# Altium PCB 5111HB015.pcbdoc
Units mm, origin at the board's own origin, x right, y up, seen from the top; angles counter-clockwise.
Board outline 132.28 x 111.66 mm, 2 copper layers (Top Layer, Top, Bottom Layer, Bottom); 10 components, 28 nets, 376 pads, 5 vias.
Unrouted connection lines stored in the file: 10.
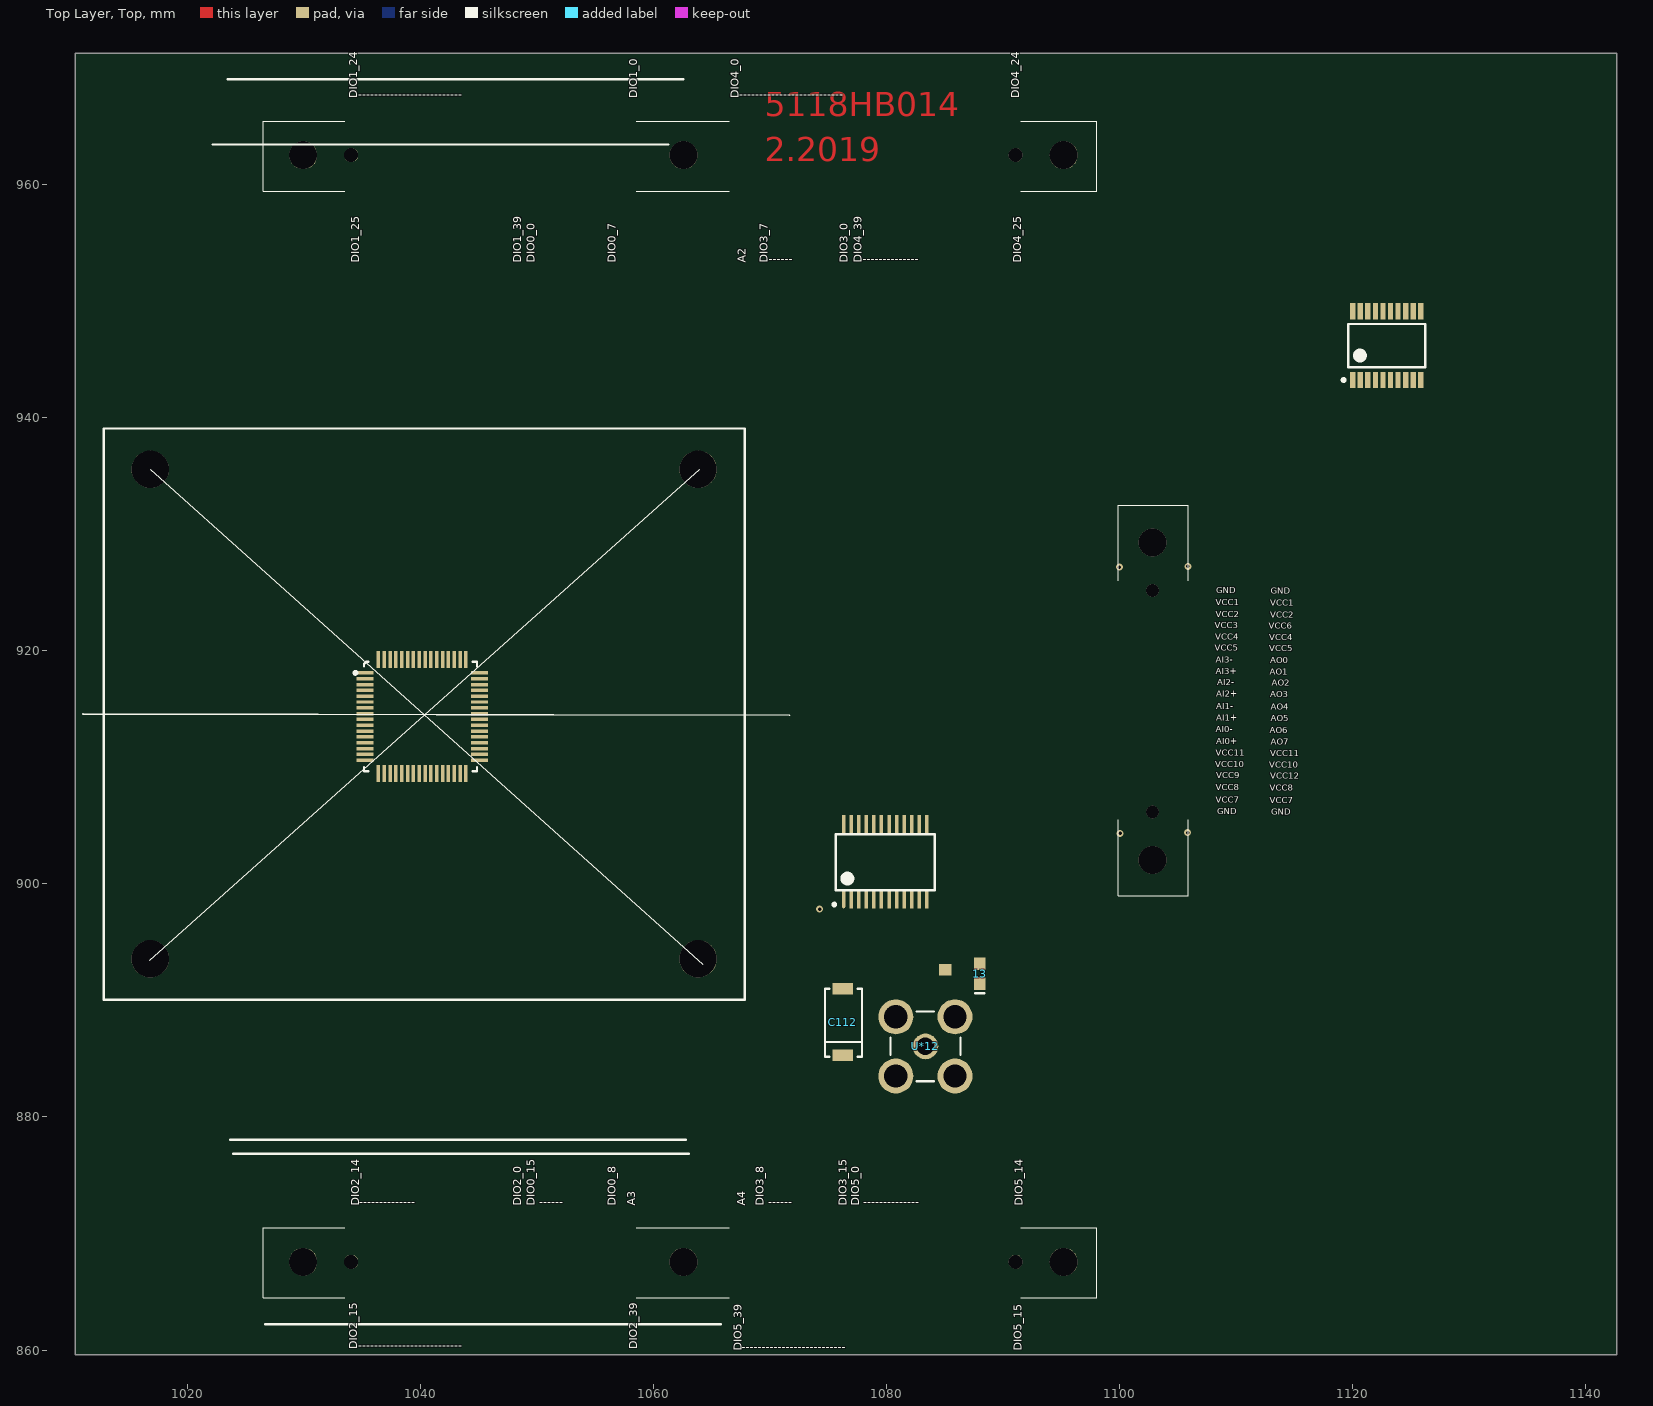
[diagram p0: Top Layer, Top view]
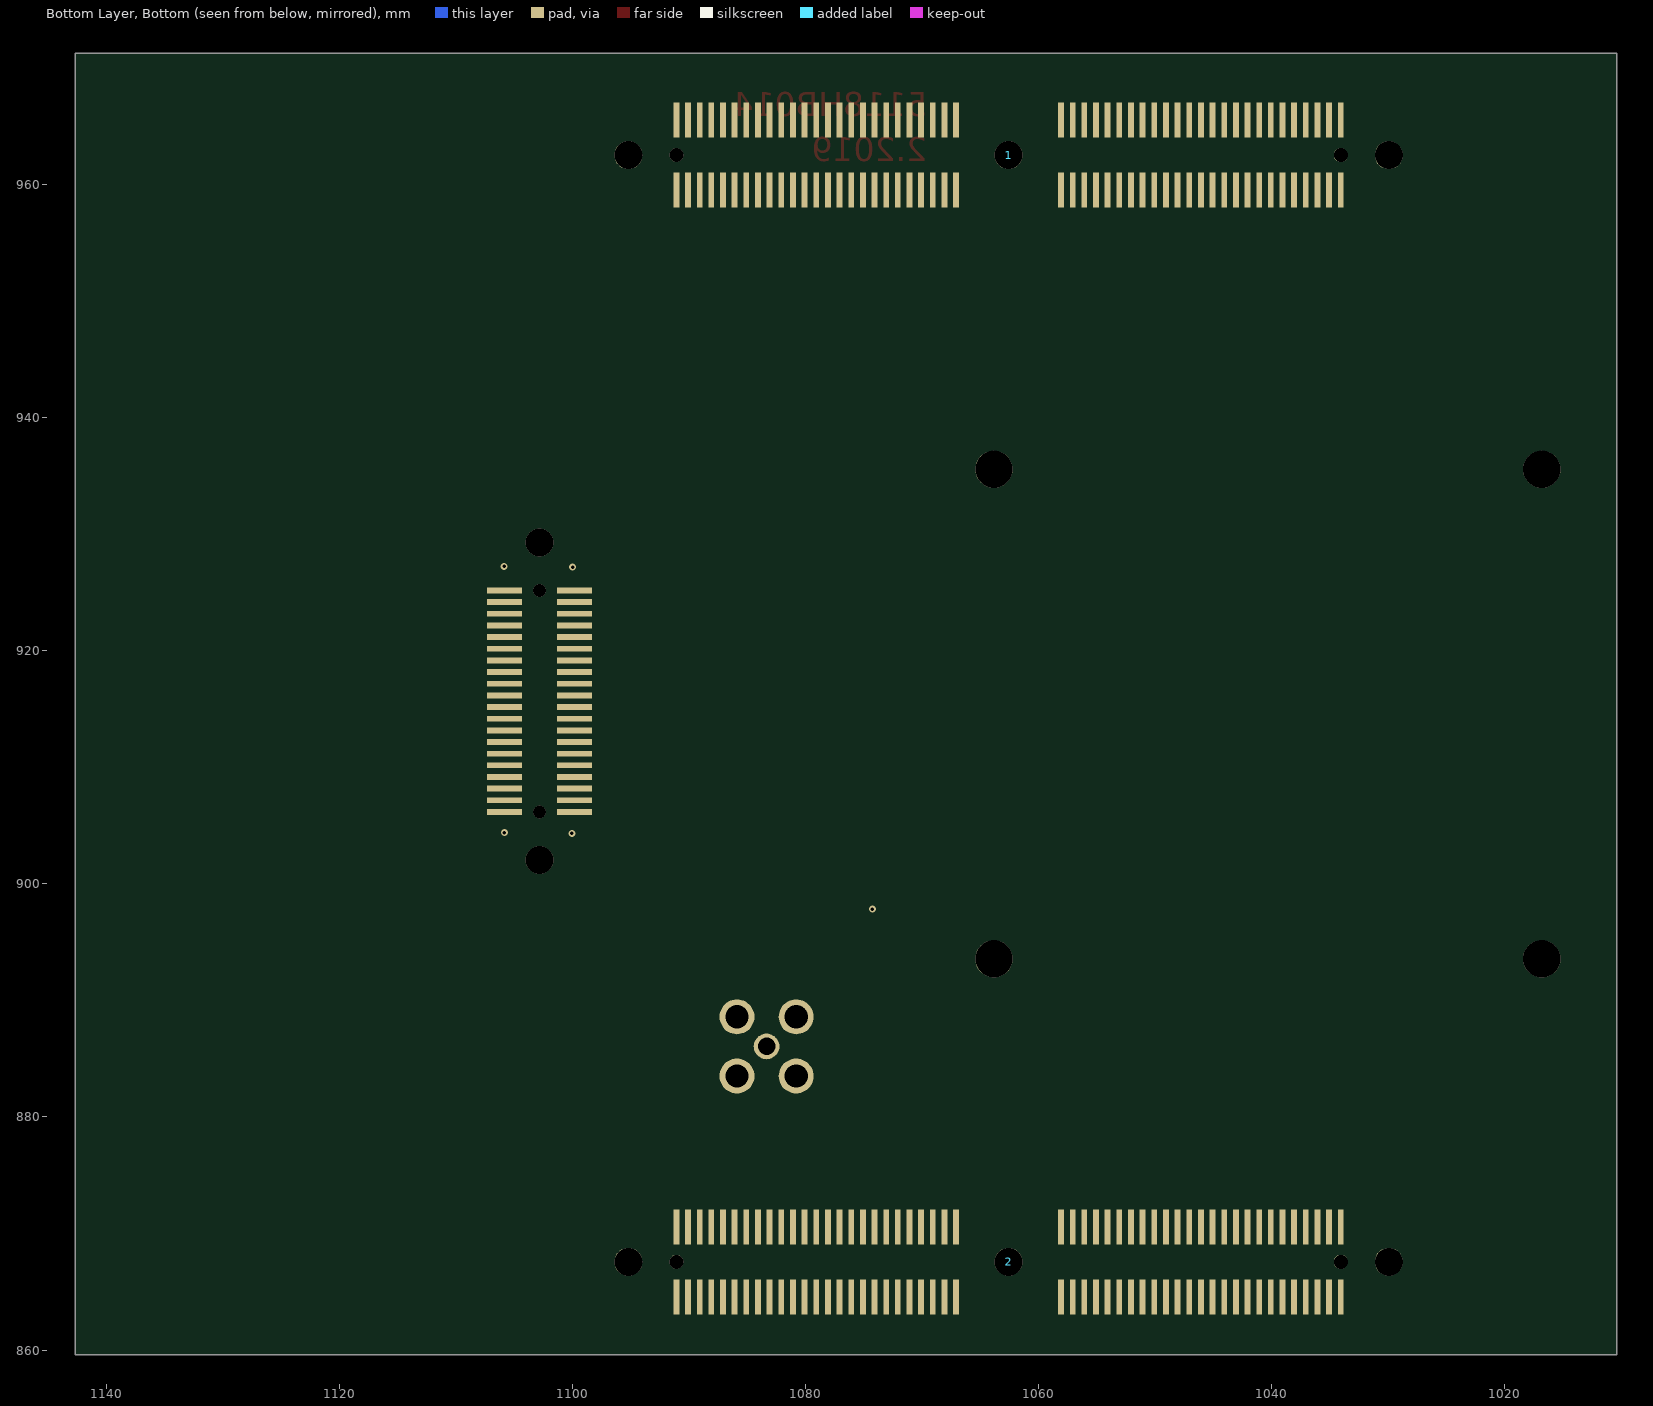
[diagram p1: Bottom Layer, Bottom view, seen from below]

## Layer stack, top to bottom
Top Solder, Top Mask: solder mask 0.0102, Solder Resist, Dk 3.5
Top Layer, Top: signal copper 0.0356
Dielectric 1: dielectric 0.32, FR-4, Dk 4.8
Bottom Layer, Bottom: signal copper 0.0356
Bottom Solder, Bot Mask: solder mask 0.0102, Solder Resist, Dk 3.5

## Board outline
1010.392,859.619 1142.675,859.619 1142.675,971.275 1010.392,971.275

## Design rules (kind name [scope] priority, off if disabled: settings)
Clearance [All] p1: gap=0.254 except(0.13: Arc-Arc Arc-Track Track-Track; 0.15: Arc-SMDPad Arc-THPad Arc-Via Arc-Fill Arc-Poly Arc-Region Track-SMDPad Track-THPad Track-Via Track-Fill Track-Poly Track-Region SMDPad-SMDPad THPad-THPad THPad-Via; 0.2: SMDPad-Fill SMDPad-Poly SMDPad-Region Via-Via)
PlaneClearance [All] p1: clearance=0.254
PolygonConnect PolygonConnect_4 [IsPolygon And InNet('GND') And OnLayer('Bottom Layer, Bottom') vs IsVia] p1: connectstyle=Relief reliefconductorwidth=0.381 reliefentries=4 polygonreliefangle="90 Angle" airgapwidth=0.254
PolygonConnect PolygonConnect_3 [IsPolygon And InNet('GND') And OnLayer('Bottom Layer, Bottom') vs IsPad] p2: connectstyle=Relief reliefconductorwidth=0.3 reliefentries=4 polygonreliefangle="90 Angle" airgapwidth=0.254
PolygonConnect PolygonConnect_2 [IsPolygon And InNet('GND') And OnLayer('Top Layer, Top') vs IsVia] p3: connectstyle=Relief reliefconductorwidth=0.381 reliefentries=4 polygonreliefangle="90 Angle" airgapwidth=0.254
PolygonConnect PolygonConnect_1 [IsPolygon And InNet('GND') And OnLayer('Top Layer, Top') vs IsPad] p4: connectstyle=Relief reliefconductorwidth=0.3 reliefentries=4 polygonreliefangle="90 Angle" airgapwidth=0.254
PolygonConnect [All] p5: connectstyle=Relief reliefconductorwidth=0.254 reliefentries=4 polygonreliefangle="90 Angle" airgapwidth=0.254
RoutingVias [All] p1: holewidth=0.3 width=0.6 viastyle="Through Hole" minholewidth=0.3 minwidth=0.6 maxholewidth=0.3 maxwidth=0.6
SolderMaskExpansion [All] p1: expansion=0.102
Width [All] p1: maxlimit=0.6 minlimit=0.3 preferedwidth=0.4
29 further rules are at their usual default settings.

## Components (designator, comment, footprint, x,y, rotation, side; value= is the part's Value field where it differs from the comment)
1 "" FSI-150-AD-V1_OTV 1034.027,965.435 r0 top
2 "" FSI-150-AD-V1_OTV 1034.027,870.493 r0 top
13 "" CC1608-0603 1088,892.3 r90 top
C112 "" К53-37-C_К53-37_C(Primary) 1076.25,885.285 r90 top
U*12 "" 919-109J 1083.35,886.05 r0 top
? "Comment" 5118HB014 1040.175,914.35 r0 top
? "Comment" AD5781 1122.925,946.175 r90 top
? "" FSI-120-AD-V2_OTV 1100.371,906.327 r90 top
? "Comment" SN74LVC4245A_SSOP_24 1079.9,901.85 r90 top
? "Comment" pad 1085.65,892.025 r90 top

## Footprints (in the part's own frame and the unit in brackets; to place one, negate y for a bottom-side part, rotate by r counter-clockwise, add the part's x,y. Pads: shape width x height; smd on the part's side, far side on the other; paste and mask are expansions set on the pad)
919-109J [mm]
  round 2.2 hole 1.5: 1(0,0)
  round 3 hole 2: 2(-2.54,-2.54) 3(2.54,-2.54) 4(2.54,2.54) 5(-2.54,2.54)
  silkscreen extent -3,-3 3,3
5118HB014 [mm] "МК5157.64-1"
  rect 1.45x0.3 smd: 1(-4.9,3.75) 2(-4.9,3.25) 3(-4.9,2.75) 4(-4.9,2.25) 5(-4.9,1.75) 6(-4.9,1.25) 7(-4.9,0.75) 8(-4.9,0.25) 9(-4.9,-0.25) 10(-4.9,-0.75) 11(-4.9,-1.25) 12(-4.9,-1.75) 13(-4.9,-2.25) 14(-4.9,-2.75) 15(-4.9,-3.25) 16(-4.9,-3.75) 33(4.9,-3.75) 34(4.9,-3.25) 35(4.9,-2.75) 36(4.9,-2.25) 37(4.9,-1.75) 38(4.9,-1.25) 39(4.9,-0.75) 40(4.9,-0.25) 41(4.9,0.25) 42(4.9,0.75) 43(4.9,1.25) 44(4.9,1.75) 45(4.9,2.25) 46(4.9,2.75) 47(4.9,3.25) 48(4.9,3.75)
  rect 0.3x1.45 smd: 17(-3.75,-4.9) 18(-3.25,-4.9) 19(-2.75,-4.9) 20(-2.25,-4.9) 21(-1.75,-4.9) 22(-1.25,-4.9) 23(-0.75,-4.9) 24(-0.25,-4.9) 25(0.25,-4.9) 26(0.75,-4.9) 27(1.25,-4.9) 28(1.75,-4.9) 29(2.25,-4.9) 30(2.75,-4.9) 31(3.25,-4.9) 32(3.75,-4.9) 49(3.75,4.9) 50(3.25,4.9) 51(2.75,4.9) 52(2.25,4.9) 53(1.75,4.9) 54(1.25,4.9) 55(0.75,4.9) 56(0.25,4.9) 57(-0.25,4.9) 58(-0.75,4.9) 59(-1.25,4.9) 60(-1.75,4.9) 61(-2.25,4.9) 62(-2.75,4.9) 63(-3.25,4.9) 64(-3.75,4.9)
  silkscreen extent -5.85,-4.7 4.7,4.7, body extent -4.5,-4.5 4.5,4.5, height 1.94
AD5781 [mm] "tssop,20"
  rect 1.4x0.45 smd: 1(-2.95,2.925) 2(-2.95,2.275) 3(-2.95,1.625) 4(-2.95,0.975) 5(-2.95,0.325) 6(-2.95,-0.325) 7(-2.95,-0.975) 8(-2.95,-1.625) 9(-2.95,-2.275) 10(-2.95,-2.925) 11(2.95,-2.925) 12(2.95,-2.275) 13(2.95,-1.625) 14(2.95,-0.975) 15(2.95,-0.325) 16(2.95,0.325) 17(2.95,0.975) 18(2.95,1.625) 19(2.95,2.275) 20(2.95,2.925)
  silkscreen extent -3.07,-3.3 1.85,3.82, body extent -2.25,-3.3 2.25,3.3, height 1.2
CC1608-0603 [mm]
  rect 1.1x1 smd: 1(-0.85,0) 2(0.85,0)
  silkscreen extent -1.7,-0.4 -1.7,0.4
FSI-120-AD-V2_OTV [mm]
  rect 0.5x3 smd far side: 1(-0.16,0.54) 2(0.84,0.54) 3(1.84,0.54) 4(2.84,0.54) 5(3.84,0.54) 6(4.84,0.54) 7(5.84,0.54) 8(6.84,0.54) 9(7.84,0.54) 10(8.84,0.54) 11(9.84,0.54) 12(10.84,0.54) 13(11.84,0.54) 14(12.84,0.54) 15(13.84,0.54) 16(14.84,0.54) 17(15.84,0.54) 18(16.84,0.54) 19(17.84,0.54) 20(18.84,0.54) 21(18.84,-5.46) 22(17.84,-5.46) 23(16.84,-5.46) 24(15.84,-5.46) 25(14.84,-5.46) 26(13.84,-5.46) 27(12.84,-5.46) 28(11.84,-5.46) 29(10.84,-5.46) 30(9.84,-5.46) 31(8.84,-5.46) 32(7.84,-5.46) 33(6.84,-5.46) 34(5.84,-5.46) 35(4.84,-5.46) 36(3.84,-5.46) 37(2.84,-5.46) 38(1.84,-5.46) 39(0.84,-5.46) 40(-0.16,-5.46)
  round 1.1 hole 1.1 unplated: 41(-0.16,-2.46) 42(18.84,-2.46)
  round 2.4 hole 2.4 unplated: 43(-4.28,-2.46) 44(22.96,-2.46)
  silkscreen extent -7.34,-5.54 26.16,0.46
FSI-150-AD-V1_OTV [mm]
  rect 0.5x3 smd far side: 1(0.06,0.08) 2(1.06,0.08) 3(2.06,0.08) 4(3.06,0.08) 5(4.06,0.08) 6(5.06,0.08) 7(6.06,0.08) 8(7.06,0.08) 9(8.06,0.08) 10(9.06,0.08) 11(10.06,0.08) 12(11.06,0.08) 13(12.06,0.08) 14(13.06,0.08) 15(14.06,0.08) 16(15.06,0.08) 17(16.06,0.08) 18(17.06,0.08) 19(18.06,0.08) 20(19.06,0.08) 21(20.06,0.08) 22(21.06,0.08) 23(22.06,0.08) 24(23.06,0.08) 25(24.06,0.08) 26(33.06,0.08) 27(34.06,0.08) 28(35.06,0.08) 29(36.06,0.08) 30(37.06,0.08) 31(38.06,0.08) 32(39.06,0.08) 33(40.06,0.08) 34(41.06,0.08) 35(42.06,0.08) 36(43.06,0.08) 37(44.06,0.08) 38(45.06,0.08) 39(46.06,0.08) 40(47.06,0.08) 41(48.06,0.08) 42(49.06,0.08) 43(50.06,0.08) 44(51.06,0.08) 45(52.06,0.08) 46(53.06,0.08) 47(54.06,0.08) 48(55.06,0.08) 49(56.06,0.08) 50(57.06,0.08) 51(57.06,-5.92) 52(56.06,-5.92) 53(55.06,-5.92) 54(54.06,-5.92) 55(53.06,-5.92) 56(52.06,-5.92) 57(51.06,-5.92) 58(50.06,-5.92) 59(49.06,-5.92) 60(48.06,-5.92) 61(47.06,-5.92) 62(46.06,-5.92) 63(45.06,-5.92) 64(44.06,-5.92) 65(43.06,-5.92) 66(42.06,-5.92) 67(41.06,-5.92) 68(40.06,-5.92) 69(39.06,-5.92) 70(38.06,-5.92) 71(37.06,-5.92) 72(36.06,-5.92) 73(35.06,-5.92) 74(34.06,-5.92) 75(33.06,-5.92) 76(24.06,-5.92) 77(23.06,-5.92) 78(22.06,-5.92) 79(21.06,-5.92) 80(20.06,-5.92) 81(19.06,-5.92) 82(18.06,-5.92) 83(17.06,-5.92) 84(16.06,-5.92) 85(15.06,-5.92) 86(14.06,-5.92) 87(13.06,-5.92) 88(12.06,-5.92) 89(11.06,-5.92) 90(10.06,-5.92) 91(9.06,-5.92) 92(8.06,-5.92) 93(7.06,-5.92) 94(6.06,-5.92) 95(5.06,-5.92) 96(4.06,-5.92) 97(3.06,-5.92) 98(2.06,-5.92) 99(1.06,-5.92) 100(0.06,-5.92)
  round 2.4 hole 2.4 unplated: 101(-4.06,-2.92) 102(28.56,-2.92) 103(61.18,-2.92)
  round 1.2 hole 1.2 unplated: 104(0.06,-2.92) 105(57.06,-2.92)
  silkscreen extent -7.5,-6 64,0
pad [mm]
  rect 1x1.1 smd: 1(0.6,0.6)
SN74LVC4245A_SSOP_24 [mm]
  oval 1.65x0.3 smd: 1(-3.125,3.575)
  rect 1.65x0.3 smd: 2(-3.125,2.925) 3(-3.125,2.275) 4(-3.125,1.625) 5(-3.125,0.975) 6(-3.125,0.325) 7(-3.125,-0.325) 8(-3.125,-0.975) 9(-3.125,-1.625) 10(-3.125,-2.275) 11(-3.125,-2.925) 12(-3.125,-3.575) 13(3.225,-3.575) 14(3.225,-2.925) 15(3.225,-2.275) 16(3.225,-1.625) 17(3.225,-0.975) 18(3.225,-0.325) 19(3.225,0.325) 20(3.225,0.975) 21(3.225,1.625) 22(3.225,2.275) 23(3.225,2.925) 24(3.225,3.575)
  silkscreen extent -3.75,-4.25 2.4,4.5, body extent -3.28,-3.95 3.28,3.95, height 1.2
К53-37-C_К53-37_C(Primary) [mm]
  rect 1x1.75 smd: A(5.715,0) B(0,0)
  silkscreen extent -0.13,-1.65 5.71,1.52

## Part data
C112: "Capacitor"

## Free pads (board coordinates)
  round 3.2 hole 3.2 unplated: 0(1016.842,893.566) 0(1016.842,935.566) 0(1063.842,893.566) 0(1063.842,935.566)

## Via types
v1: diameter 0.6, hole 0.3, Top Layer, Top to Bottom Layer, Bottom, tented both sides, 4 vias
v2: diameter 0.6, hole 0.3, Top Layer, Top to Bottom Layer, Bottom, 1 vias

## Nets (pads, with @x,y where several pads share a name; then routed paths per layer and width w, separated by ;. In a path a pad name is that pad's centre, name@x,y a point inside that pad or via, vN(x,y) a via of type N, cw(c..) or ccw(c..) an arc to the next point about the centre after c; other vN are vias at no path point)
CLK: ?.5@1035.275,916.1
CLK_SH: ?.6@1035.275,915.6
D01: ?.50
D02: ?.49
D03: ?.48
D04: ?.47
D05: ?.46
D06: ?.45
D07: ?.44@1045.075,916.1
D08: ?.43@1045.075,915.6
D09: ?.42@1045.075,915.1
D10: ?.41@1045.075,914.6
D11: ?.40@1045.075,914.1
D12: ?.39@1045.075,913.6
D13: ?.38@1045.075,913.1
D14: ?.37@1045.075,912.6
D15: 
GND_0: ?.28@1041.925,909.45
GND_A: ?.1@1035.275,918.1 ?.55 ?.56 ?.57 ?.58 ?.63
GND_D: ?.35@1045.075,911.6
INADC: ?.62
READY: ?.36@1045.075,912.1
RESET: ?.32@1043.925,909.45
RESETSAR: ?.33@1045.075,910.6
STROB: 
Vbias: ?.61
Vcc: ?.2@1035.275,917.6 ?.53 ?.54 ?.59 ?.60 ?.64
Vccd: ?.34@1045.075,911.1
pads on no net: 1.1 1.2 1.3 1.4 1.5 1.6 1.7 1.8 1.9 1.10 1.11 1.12 1.13 1.14 1.15 1.16 1.17 1.18 1.19 1.20 1.21 1.22 1.23 1.24 1.25 1.26 1.27 1.28 1.29 1.30 1.31 1.32 1.33 1.34 1.35 1.36 1.37 1.38 1.39 1.40 1.41 1.42 1.43 1.44 1.45 1.46 1.47 1.48 1.49 1.50 1.51 1.52 1.53 1.54 1.55 1.56 1.57 1.58 1.59 1.60 1.61 1.62 1.63 1.64 1.65 1.66 1.67 1.68 1.69 1.70 1.71 1.72 1.73 1.74 1.75 1.76 1.77 1.78 1.79 1.80 1.81 1.82 1.83 1.84 1.85 1.86 1.87 1.88 1.89 1.90 1.91 1.92 1.93 1.94 1.95 1.96 1.97 1.98 1.99 1.100 1.101 1.102 1.103 1.104 1.105 2.1 2.2 2.3 2.4 2.5 2.6 2.7 2.8 2.9 2.10 2.11 2.12 2.13 2.14 2.15 2.16 2.17 2.18 2.19 2.20 2.21 2.22 2.23 2.24 2.25 2.26 2.27 2.28 2.29 2.30 2.31 2.32 2.33 2.34 2.35 2.36 2.37 2.38 2.39 2.40 2.41 2.42 2.43 2.44 2.45 2.46 2.47 2.48 2.49 2.50 2.51 2.52 2.53 2.54 2.55 2.56 2.57 2.58 2.59 2.60 2.61 2.62 2.63 2.64 2.65 2.66 2.67 2.68 2.69 2.70 2.71 2.72 2.73 2.74 2.75 2.76 2.77 2.78 2.79 2.80 2.81 2.82 2.83 2.84 2.85 2.86 2.87 2.88 2.89 2.90 2.91 2.92 2.93 2.94 2.95 2.96 2.97 2.98 2.99 2.100 2.101 2.102 2.103 2.104 2.105 13.1 13.2 ?.1@1076.325,898.725 ?.1@1085.05,892.625 ?.1@1099.831,906.167 ?.1@1120,943.225 ?.2@1076.975,898.725 ?.2@1099.831,907.167 ?.2@1120.65,943.225 ?.3 ?.4 ?.5@1078.925,898.725 ?.5@1099.831,910.167 ?.5@1122.6,943.225 ?.6@1079.575,898.725 ?.6@1099.831,911.167 ?.6@1123.25,943.225 ?.7 ?.8 ?.9 ?.10 ?.11 ?.12 ?.13 ?.14 ?.15 ?.16 ?.17 ?.18 ?.19 ?.20 ?.21 ?.22 ?.23 ?.24 ?.25 ?.26 ?.27 ?.28@1105.831,918.167 ?.29 ?.30 ?.31 ?.32@1105.831,914.167 ?.33@1105.831,913.167 ?.34@1105.831,912.167 ?.35@1105.831,911.167 ?.36@1105.831,910.167 ?.37@1105.831,909.167 ?.38@1105.831,908.167 ?.39@1105.831,907.167 ?.40@1105.831,906.167 ?.41@1102.831,906.167 ?.42@1102.831,925.167 ?.43@1102.831,902.047 ?.44@1102.831,929.287 ?.51 ?.52 C112.A C112.B U*12.1 U*12.2 U*12.3 U*12.4 U*12.5
copper on no net:
  other v1: 1100.041,904.329 1105.835,904.391 1099.98,927.167 1105.866,927.228
  other v2: 1074.275,897.825

## Other copper
Top Layer, Top:
  pour cut-out: 1067.73,932.529 1068.508,933.519 1069.003,934.58 1069.144,935.711 1069.074,936.277 1068.932,936.772 1068.791,937.267 1068.508,937.832 1067.801,938.681 1066.882,939.388 1065.856,939.918 1064.796,939.918 1063.735,939.848 1063.205,939.671 1062.639,939.388 1062.144,939.034 1061.684,938.646 1061.295,938.186 1060.977,937.726 1060.694,937.231 1060.518,936.701 1060.411,935.676 1060.482,934.615 1060.977,933.554 1061.649,932.529 1062.639,931.822 1063.735,931.362 1064.831,931.256 1065.856,931.433 1066.846,931.857
  pour cut-out: 1060.82,865.755 1061.282,865.422 1061.44,865.331 1061.874,865.145 1062.433,865.057 1063.213,865.127 1063.848,865.405 1064.345,865.804 1064.637,866.147 1064.869,866.546 1065.013,867.02 1065.078,867.488 1065.059,867.925 1064.957,868.356 1064.776,868.774 1064.484,869.201 1064.131,869.53 1063.937,869.674 1063.723,869.804 1063.403,869.929 1063.176,869.999 1062.874,870.064 1062.545,870.077 1062.099,870.036 1061.737,869.938 1061.366,869.771 1060.944,869.497 1060.624,869.154 1060.35,868.737 1060.229,868.453 1060.136,868.147 1060.076,867.799 1060.071,867.484 1060.132,866.955 1060.317,866.454 1060.559,866.078
  pour cut-out: 1060.823,960.718 1061.285,960.385 1061.443,960.294 1061.877,960.108 1062.436,960.02 1063.216,960.09 1063.851,960.368 1064.348,960.767 1064.64,961.11 1064.872,961.509 1065.016,961.983 1065.081,962.451 1065.062,962.888 1064.96,963.319 1064.779,963.737 1064.487,964.164 1064.134,964.493 1063.94,964.637 1063.726,964.767 1063.406,964.892 1063.179,964.962 1062.877,965.027 1062.548,965.04 1062.102,964.999 1061.74,964.901 1061.369,964.734 1060.947,964.46 1060.627,964.117 1060.353,963.7 1060.232,963.416 1060.139,963.11 1060.079,962.762 1060.074,962.447 1060.135,961.918 1060.32,961.417 1060.562,961.041
  pour cut-out: 1028.206,865.766 1028.668,865.433 1028.826,865.342 1029.26,865.156 1029.819,865.068 1030.599,865.138 1031.234,865.416 1031.731,865.815 1032.023,866.158 1032.255,866.557 1032.399,867.031 1032.464,867.499 1032.445,867.936 1032.343,868.367 1032.162,868.785 1031.87,869.212 1031.517,869.541 1031.323,869.685 1031.109,869.815 1030.789,869.94 1030.562,870.01 1030.26,870.075 1029.931,870.088 1029.485,870.047 1029.123,869.949 1028.752,869.782 1028.33,869.508 1028.01,869.165 1027.736,868.748 1027.615,868.464 1027.522,868.158 1027.462,867.81 1027.457,867.495 1027.518,866.966 1027.703,866.465 1027.945,866.089
  pour cut-out: 1019.735,890.49 1020.513,891.48 1021.008,892.541 1021.149,893.672 1021.079,894.238 1020.937,894.733 1020.796,895.228 1020.513,895.794 1019.806,896.642 1018.887,897.349 1017.861,897.879 1016.801,897.879 1015.74,897.809 1015.21,897.632 1014.644,897.349 1014.149,896.996 1013.689,896.607 1013.301,896.147 1012.982,895.687 1012.699,895.192 1012.523,894.662 1012.417,893.637 1012.487,892.576 1012.982,891.516 1013.654,890.49 1014.644,889.783 1015.74,889.323 1016.836,889.217 1017.861,889.394 1018.851,889.818
  pour cut-out: 1019.802,932.49 1020.58,933.48 1021.075,934.541 1021.216,935.672 1021.146,936.238 1021.004,936.733 1020.863,937.228 1020.58,937.794 1019.873,938.642 1018.954,939.349 1017.928,939.879 1016.868,939.879 1015.807,939.809 1015.277,939.632 1014.711,939.349 1014.216,938.996 1013.756,938.607 1013.368,938.147 1013.049,937.687 1012.766,937.192 1012.59,936.662 1012.484,935.637 1012.554,934.576 1013.049,933.516 1013.721,932.49 1014.711,931.783 1015.807,931.323 1016.903,931.217 1017.928,931.394 1018.918,931.818
  pour cut-out: 1028.216,960.701 1028.678,960.368 1028.836,960.277 1029.27,960.091 1029.829,960.003 1030.609,960.073 1031.244,960.351 1031.741,960.75 1032.033,961.093 1032.265,961.492 1032.409,961.966 1032.474,962.434 1032.455,962.871 1032.353,963.302 1032.172,963.72 1031.88,964.147 1031.527,964.476 1031.333,964.62 1031.119,964.75 1030.799,964.875 1030.572,964.945 1030.27,965.01 1029.941,965.023 1029.495,964.982 1029.133,964.884 1028.762,964.717 1028.34,964.443 1028.02,964.1 1027.746,963.683 1027.625,963.399 1027.532,963.093 1027.472,962.745 1027.467,962.43 1027.528,961.901 1027.713,961.4 1027.955,961.024
  pour cut-out: 1066.793,890.524 1067.571,891.514 1068.066,892.575 1068.207,893.706 1068.137,894.272 1067.995,894.767 1067.854,895.262 1067.571,895.828 1066.864,896.676 1065.945,897.383 1064.919,897.913 1063.859,897.913 1062.798,897.843 1062.268,897.666 1061.702,897.383 1061.207,897.03 1060.747,896.641 1060.359,896.181 1060.04,895.721 1059.757,895.226 1059.581,894.696 1059.475,893.671 1059.545,892.61 1060.04,891.55 1060.712,890.524 1061.702,889.817 1062.798,889.357 1063.894,889.251 1064.919,889.428 1065.909,889.852
  pour cut-out: 1093.453,865.762 1093.915,865.429 1094.073,865.338 1094.507,865.152 1095.066,865.064 1095.846,865.134 1096.481,865.412 1096.978,865.811 1097.27,866.154 1097.502,866.553 1097.646,867.027 1097.711,867.495 1097.692,867.932 1097.59,868.363 1097.409,868.781 1097.117,869.208 1096.764,869.537 1096.57,869.681 1096.356,869.811 1096.036,869.936 1095.809,870.006 1095.507,870.071 1095.178,870.084 1094.732,870.043 1094.37,869.945 1093.999,869.778 1093.577,869.504 1093.257,869.161 1092.983,868.744 1092.862,868.46 1092.769,868.154 1092.709,867.806 1092.704,867.491 1092.765,866.962 1092.95,866.461 1093.192,866.085
  pour cut-out: 1093.442,960.703 1093.904,960.37 1094.062,960.279 1094.496,960.093 1095.055,960.005 1095.835,960.075 1096.47,960.353 1096.967,960.752 1097.259,961.095 1097.491,961.494 1097.635,961.968 1097.7,962.436 1097.681,962.873 1097.579,963.304 1097.398,963.722 1097.106,964.149 1096.753,964.478 1096.559,964.622 1096.345,964.752 1096.025,964.877 1095.798,964.947 1095.496,965.012 1095.167,965.025 1094.721,964.984 1094.359,964.886 1093.988,964.719 1093.566,964.445 1093.246,964.102 1092.972,963.685 1092.851,963.401 1092.758,963.095 1092.698,962.747 1092.693,962.432 1092.754,961.903 1092.939,961.402 1093.181,961.026
  pour cut-out: 1101.028,900.231 1101.49,899.898 1101.648,899.807 1102.082,899.621 1102.641,899.533 1103.421,899.603 1104.056,899.881 1104.553,900.28 1104.845,900.623 1105.077,901.022 1105.221,901.496 1105.286,901.964 1105.267,902.401 1105.165,902.832 1104.984,903.25 1104.692,903.677 1104.339,904.006 1104.145,904.15 1103.931,904.28 1103.611,904.405 1103.384,904.475 1103.082,904.54 1102.753,904.553 1102.307,904.512 1101.945,904.414 1101.574,904.247 1101.152,903.973 1100.832,903.63 1100.558,903.213 1100.437,902.929 1100.344,902.623 1100.284,902.275 1100.279,901.96 1100.34,901.431 1100.525,900.93 1100.767,900.554
  pour cut-out: 1101.062,927.475 1101.524,927.142 1101.682,927.051 1102.116,926.865 1102.675,926.777 1103.455,926.847 1104.09,927.125 1104.587,927.524 1104.879,927.867 1105.111,928.266 1105.255,928.74 1105.32,929.208 1105.301,929.645 1105.199,930.076 1105.018,930.494 1104.726,930.921 1104.373,931.25 1104.179,931.394 1103.965,931.524 1103.645,931.649 1103.418,931.719 1103.116,931.784 1102.787,931.797 1102.341,931.756 1101.979,931.658 1101.608,931.491 1101.186,931.217 1100.866,930.874 1100.592,930.457 1100.471,930.173 1100.378,929.867 1100.318,929.519 1100.313,929.204 1100.374,928.675 1100.559,928.174 1100.801,927.798
  text "5118HB014" at 1069.544,965.158 h3.53
  text "2.2019" at 1069.544,961.299 h3.53
Bottom Layer, Bottom:
  pour cut-out: 1067.691,932.582 1068.469,933.572 1068.964,934.633 1069.105,935.764 1069.035,936.33 1068.893,936.825 1068.752,937.32 1068.469,937.885 1067.762,938.734 1066.843,939.441 1065.817,939.971 1064.757,939.971 1063.696,939.901 1063.166,939.724 1062.6,939.441 1062.105,939.087 1061.645,938.699 1061.256,938.239 1060.938,937.779 1060.655,937.284 1060.479,936.754 1060.373,935.729 1060.443,934.668 1060.938,933.607 1061.688,932.476 1062.6,931.875 1063.696,931.415 1064.792,931.309 1065.817,931.486 1066.807,931.91
  pour cut-out: 1104.182,902.956 1104.191,927.649 1101.388,927.649 1101.388,902.96
  pour cut-out: 1019.732,890.524 1020.509,891.514 1021.004,892.574 1021.146,893.706 1021.075,894.272 1020.934,894.766 1020.792,895.261 1020.509,895.827 1019.802,896.676 1018.883,897.383 1017.858,897.913 1016.797,897.913 1015.736,897.842 1015.206,897.666 1014.64,897.383 1014.145,897.029 1013.686,896.64 1013.297,896.181 1012.979,895.721 1012.696,895.226 1012.519,894.696 1012.413,893.67 1012.484,892.61 1012.979,891.549 1013.728,890.418 1014.64,889.817 1015.736,889.357 1016.832,889.251 1017.858,889.428 1018.848,889.852
  pour cut-out: 1019.765,932.516 1020.542,933.506 1021.037,934.566 1021.179,935.698 1021.108,936.264 1020.967,936.758 1020.825,937.253 1020.542,937.819 1019.835,938.668 1018.916,939.375 1017.891,939.905 1016.83,939.905 1015.769,939.834 1015.239,939.658 1014.673,939.375 1014.178,939.021 1013.719,938.632 1013.33,938.173 1013.012,937.713 1012.729,937.218 1012.552,936.688 1012.446,935.662 1012.517,934.602 1013.012,933.541 1013.761,932.41 1014.673,931.809 1015.769,931.349 1016.865,931.243 1017.891,931.42 1018.881,931.844
  pour cut-out: 1066.851,890.491 1067.628,891.481 1068.123,892.541 1068.265,893.673 1068.194,894.239 1068.053,894.733 1067.911,895.228 1067.628,895.794 1066.921,896.643 1066.002,897.35 1064.977,897.88 1063.916,897.88 1062.855,897.809 1062.325,897.633 1061.759,897.35 1061.264,896.996 1060.805,896.607 1060.416,896.148 1060.098,895.688 1059.815,895.193 1059.638,894.663 1059.532,893.637 1059.603,892.577 1060.098,891.516 1060.847,890.385 1061.759,889.784 1062.855,889.324 1063.951,889.218 1064.977,889.395 1065.967,889.819
  pour cut-out: 1066.776,961.163 1091.469,961.154 1091.469,963.957 1066.78,963.957
  pour cut-out: 1033.675,961.163 1058.368,961.154 1058.368,963.957 1033.679,963.957
  pour cut-out: 1033.709,866.205 1058.402,866.196 1058.402,868.999 1033.713,868.999
  pour cut-out: 1066.776,866.171 1091.469,866.162 1091.469,868.965 1066.78,868.965

## Silkscreen, mask and mechanical layers (free items; w line width, h text height)
Top Overlay, Top Silk:
  lines w0.05: 1016.798,893.463 1063.975,935.588 ; 1016.842,935.588 1064.263,893.105
  lines w0.15: 1011.064,914.578 1071.68,914.463
  lines w0.2: 1022.197,963.431 1061.283,963.431 ; 1023.506,969.026 1062.592,969.026 ; 1023.721,878.054 1062.807,878.054 ; 1023.951,876.83 1063.037,876.83 ; 1026.707,862.202 1065.793,862.202 ; 1012.842,890.066 1012.842,939.066 1067.842,939.066 1067.842,890.066 1012.842,890.066
  text "DIO1_24" at 1034.587,967.376 h0.67 r90
  text "--------------------------" at 1034.673,967.376 h0.67
  text "DIO1_0" at 1058.62,967.376 h0.67 r90
  text "DIO4_0" at 1067.337,967.376 h0.67 r90
  text "--------------------------" at 1067.384,967.376 h0.67
  text "DIO4_24" at 1091.416,967.376 h0.67 r90
  text "DIO1_25" at 1034.765,953.266 h0.67 r90
  text "DIO1_39" at 1048.675,953.266 h0.67 r90
  text "DIO0_0" at 1049.849,953.266 h0.67 r90
  text "DIO0_7" at 1056.795,953.266 h0.67 r90
  text "A2" at 1067.947,953.266 h0.67 r90
  text "DIO3_7" at 1069.807,953.266 h0.67 r90
  text "------" at 1069.925,953.266 h0.67
  text "DIO3_0" at 1076.681,953.266 h0.67 r90
  text "DIO4_39" at 1077.905,953.266 h0.67 r90
  text "--------------" at 1077.965,953.266 h0.67
  text "DIO4_25" at 1091.548,953.266 h0.67 r90
  text "GND" at 1108.314,924.914 h0.52
  text "GND" at 1112.964,924.866 h0.52
  text "VCC1" at 1108.264,923.898 h0.52
  text "VCC1" at 1112.914,923.85 h0.52
  text "VCC2" at 1108.264,922.881 h0.52
  text "VCC2" at 1112.914,922.833 h0.52
  text "VCC3" at 1108.164,921.914 h0.52
  text "VCC6" at 1112.814,921.866 h0.52
  text "VCC4" at 1108.214,920.947 h0.52
  text "VCC4" at 1112.864,920.899 h0.52
  text "VCC5" at 1108.189,920.006 h0.52
  text "VCC5" at 1112.839,919.958 h0.52
  text "AI3-" at 1108.264,918.989 h0.52
  text "AO0" at 1112.914,918.941 h0.52
  text "AI3+" at 1108.239,917.997 h0.52
  text "AO1" at 1112.889,917.949 h0.52
  text "AI2-" at 1108.389,917.03 h0.52
  text "AO2" at 1113.039,916.982 h0.52
  text "AI2+" at 1108.289,916.039 h0.52
  text "AO3" at 1112.939,915.991 h0.52
  text "AI1-" at 1108.314,914.997 h0.52
  text "AO4" at 1112.964,914.949 h0.52
  text "AI1+" at 1108.314,913.98 h0.52
  text "AO5" at 1112.964,913.932 h0.52
  text "AI0-" at 1108.239,912.988 h0.52
  text "AO6" at 1112.889,912.94 h0.52
  text "AI0+" at 1108.314,911.972 h0.52
  text "AO7" at 1112.964,911.924 h0.52
  text "VCC11" at 1108.264,911.005 h0.52
  text "VCC11" at 1112.914,910.957 h0.52
  text "VCC10" at 1108.214,909.988 h0.52
  text "VCC10" at 1112.864,909.94 h0.52
  text "VCC9" at 1108.289,909.046 h0.52
  text "VCC12" at 1112.939,908.998 h0.52
  text "VCC8" at 1108.239,908.03 h0.52
  text "VCC8" at 1112.889,907.982 h0.52
  text "VCC7" at 1108.239,906.963 h0.52
  text "VCC7" at 1112.889,906.915 h0.52
  text "GND" at 1108.364,905.971 h0.52
  text "GND" at 1113.014,905.923 h0.52
  text "DIO2_14" at 1034.763,872.397 h0.67 r90
  text "--------------" at 1034.766,872.397 h0.67
  text "DIO2_0" at 1048.673,872.397 h0.67 r90
  text "DIO0_15" at 1049.847,872.397 h0.67 r90
  text "------" at 1050.207,872.397 h0.67
  text "DIO0_8" at 1056.793,872.397 h0.67 r90
  text "A3" at 1058.432,872.397 h0.67 r90
  text "A4" at 1067.887,872.396 h0.67 r90
  text "DIO3_8" at 1069.464,872.396 h0.67 r90
  text "------" at 1069.882,872.396 h0.67
  text "DIO3_15" at 1076.598,872.396 h0.67 r90
  text "DIO5_0" at 1077.678,872.396 h0.67 r90
  text "--------------" at 1078.005,872.396 h0.67
  text "DIO5_14" at 1091.688,872.396 h0.67 r90
  text "DIO2_15" at 1034.587,860.056 h0.67 r90
  text "--------------------------" at 1034.673,860.056 h0.67
  text "DIO2_39" at 1058.62,860.056 h0.67 r90
  text "DIO5_39" at 1067.604,859.941 h0.67 r90
  text "--------------------------" at 1067.608,859.941 h0.67
  text "DIO5_15" at 1091.603,859.941 h0.67 r90
Mechanical 1, Board:
  lines w0.2: 1010.492,970 1010.494,859.735 ; 1010.502,859.719 1106.723,859.738 ; 1010.503,970 1106.774,970 ; 1095.459,932.642 cw(c1106.289,944.419) 1106.764,960.412 ; 1095.574,932.641 1107.953,932.642 ; 1095.906,898.5 ccw(c1106.19,886.244) 1106.777,870.254 ; 1095.974,898.541 1108.012,898.548 ; 1106.734,970.037 1106.739,960.411 ; 1106.769,859.807 1106.774,870.241 ; 1108.014,898.541 1108.014,932.541 ; 1115.883,953.103 1115.884,940.724 ; 1117.322,939.608 1129.701,939.609 ; 1117.749,953.166 1130.128,953.167 ; 1131.775,952.625 1131.776,940.246